# Altium PCB RD15002SCT_Collection.PcbDoc
Units mil, origin at the board's own origin, x right, y up, seen from the top; angles counter-clockwise.
Board outline 2710 x 2010 mil, 2 copper layers (Top Layer, Bottom Layer); 185 components, 184 nets, 612 pads, 138 vias.
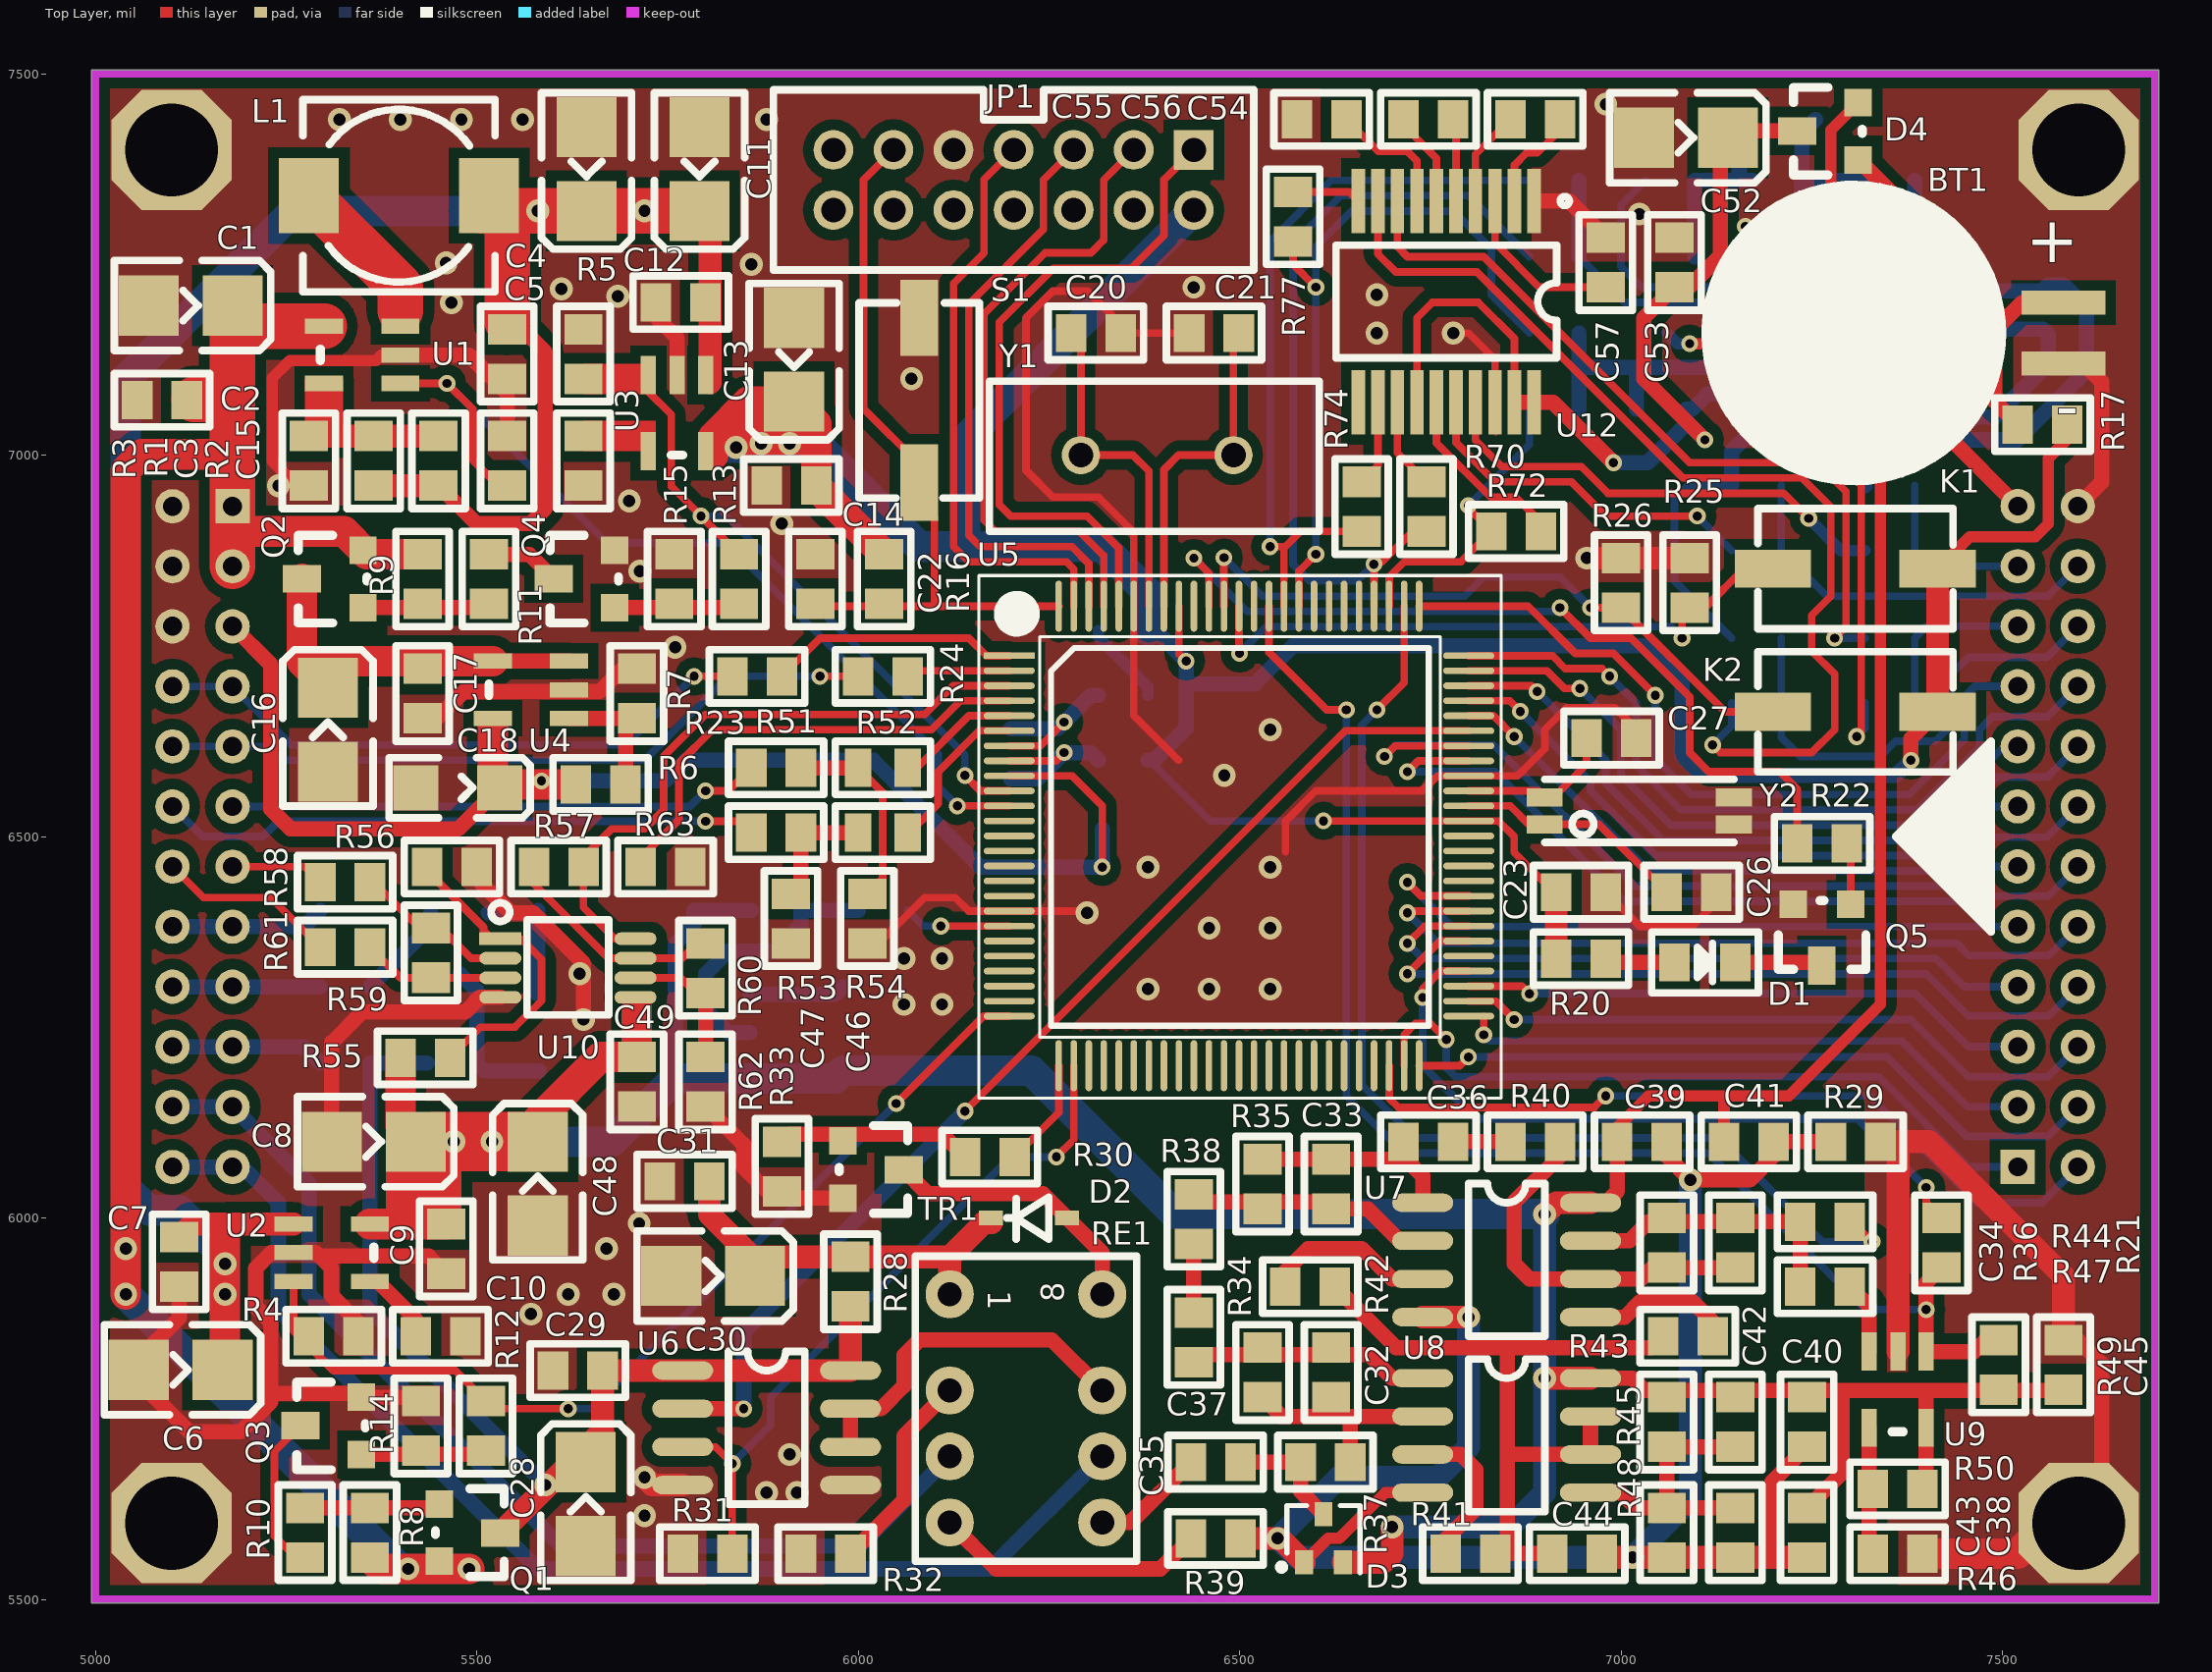
[diagram p0: Top Layer view]
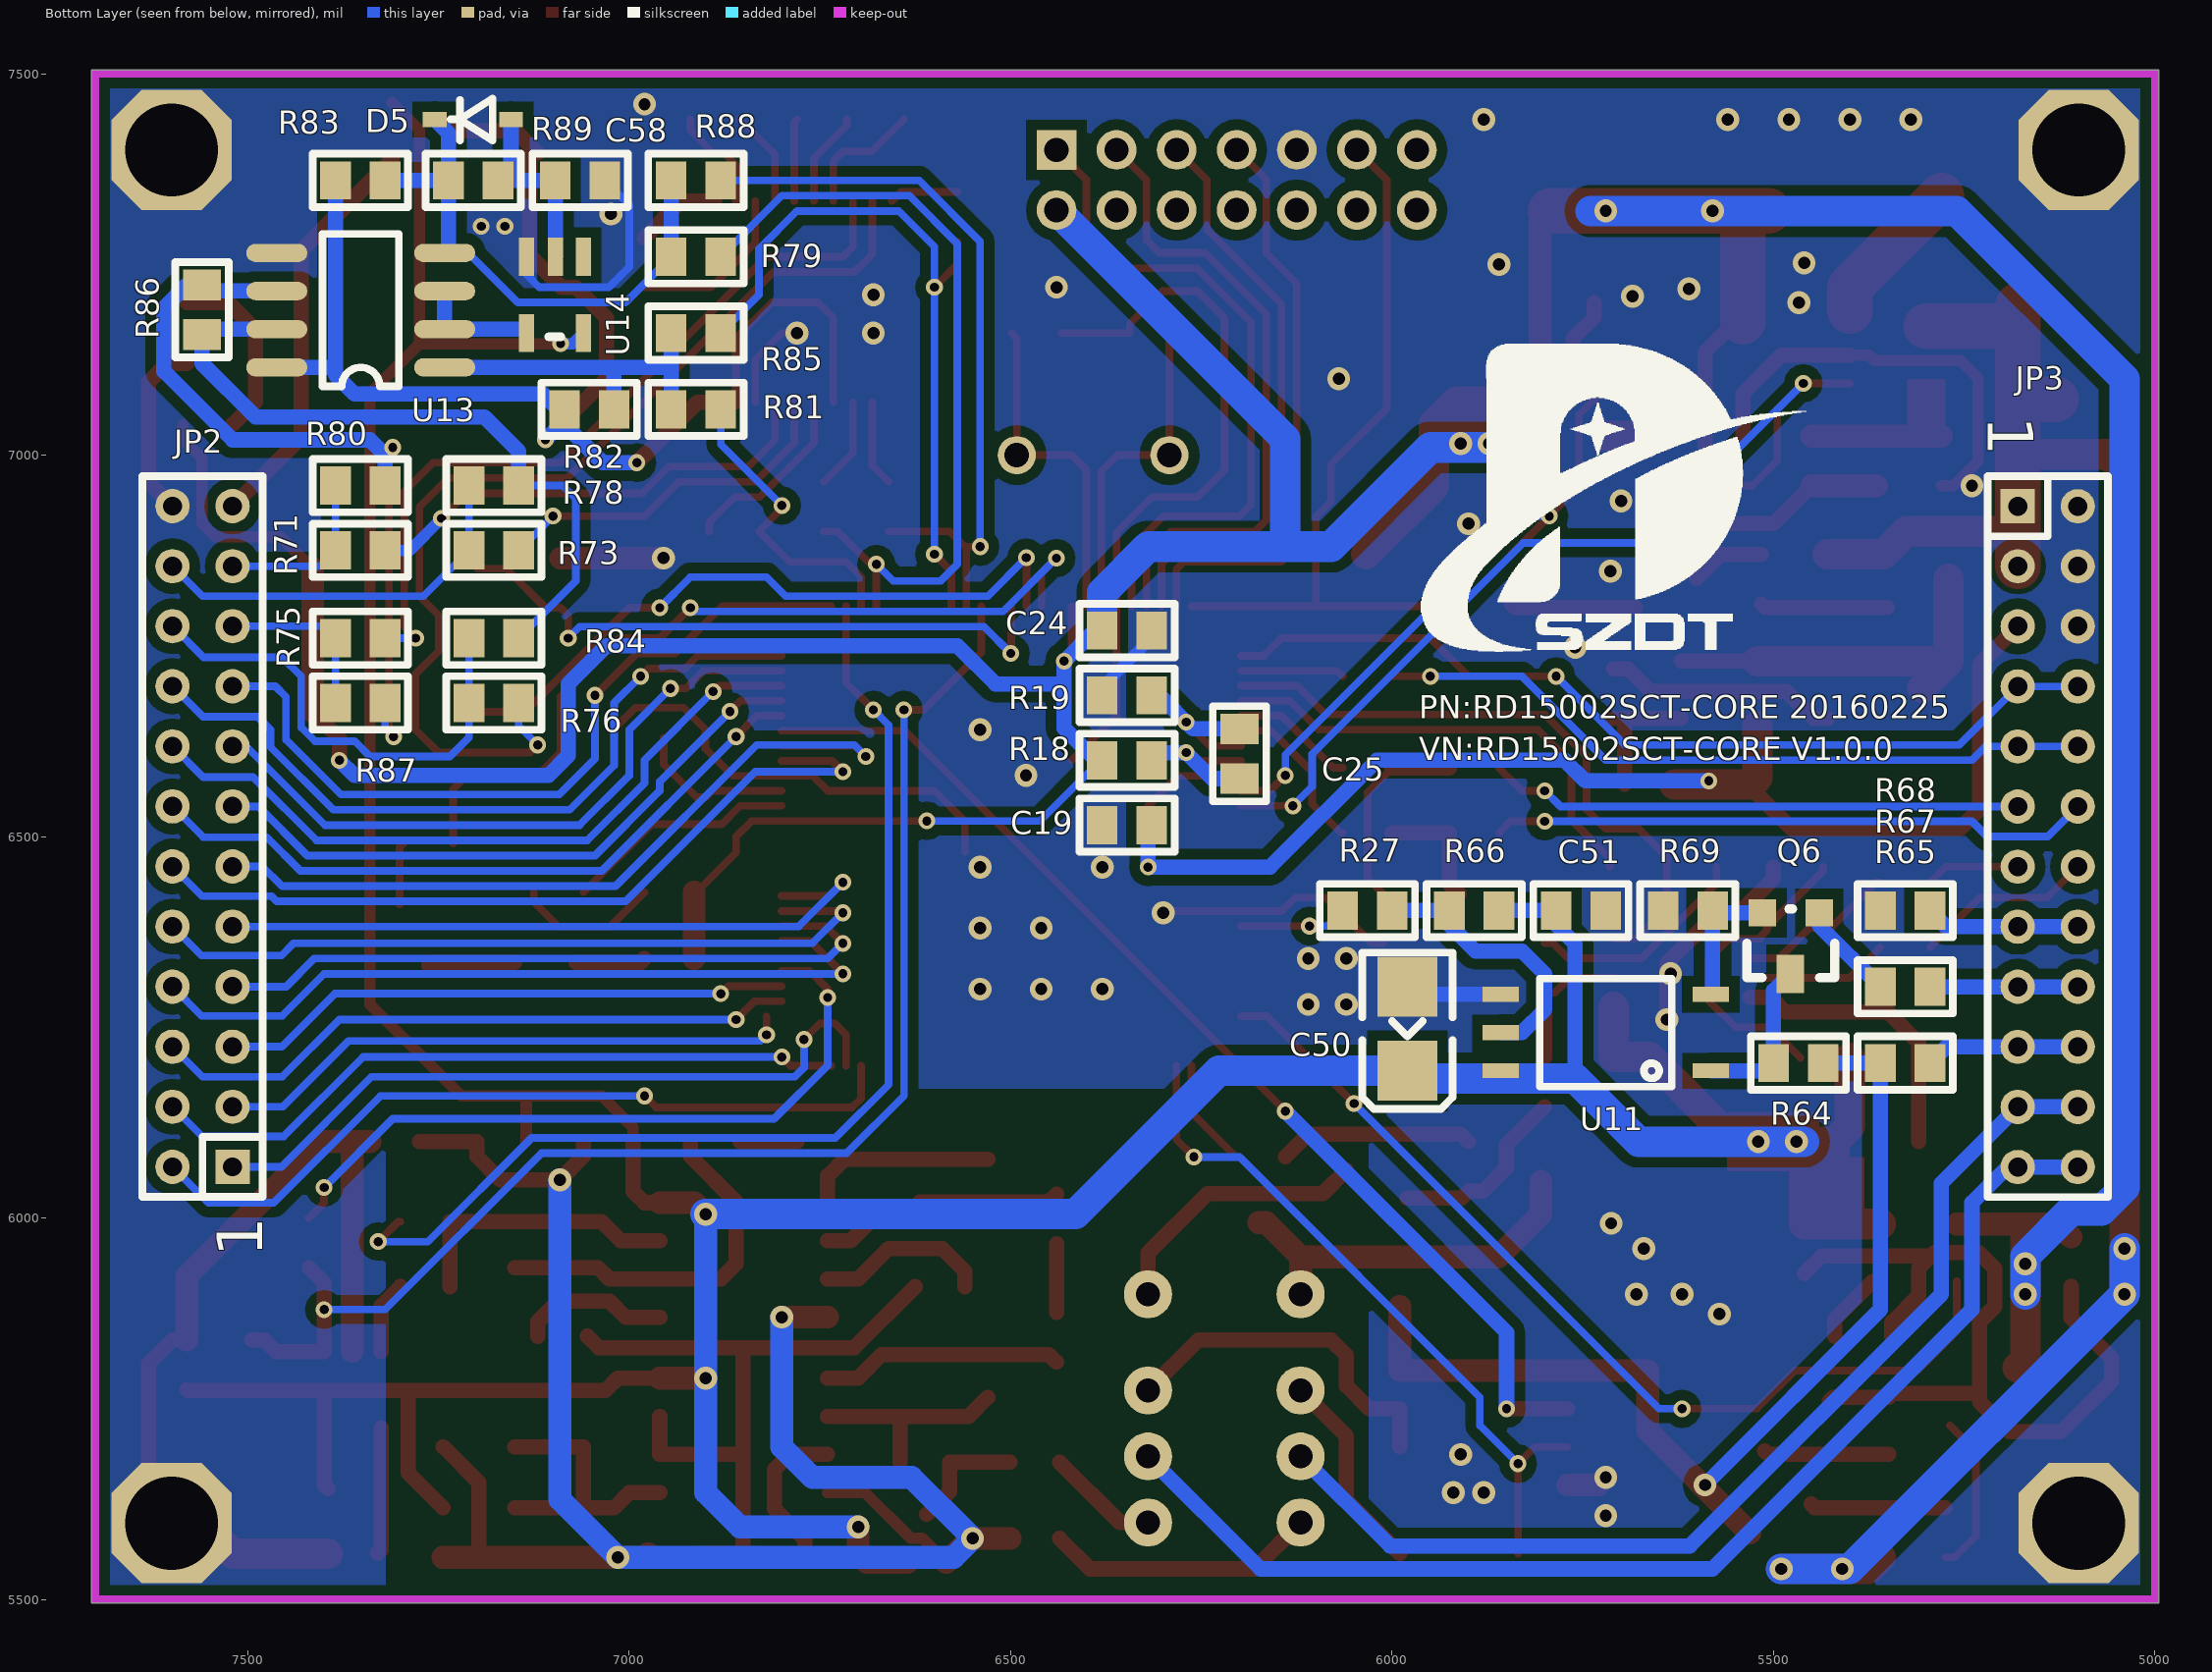
[diagram p1: Bottom Layer view, seen from below]

## Layer stack, top to bottom
Top Layer: signal copper 1.4
Dielectric: dielectric 12.6, FR-4, Dk 4.8
Bottom Layer: signal copper 1.4

## Board outline
4995,5495 7705,5495 7705,7505 4995,7505 4995,5495

## Design rules (kind name [scope] priority, off if disabled: settings)
Clearance [All] p1: gap=6
ComponentClearance [All] p1 off: gap=10 collisioncheckmode=3 verticalgap=10 showdistances=FALSE
HoleSize [All] p1: absolutevalues=TRUE maxlimit=1000 minlimit=1 maxpercent=80.000 minpercent=20.000
MinimumSolderMaskSliver [All] p1 off: minsoldermaskwidth=10
NetAntennae [All] p1 off: netantennaetolerance=0
PolygonConnect [All] p1: connectstyle=Direct reliefconductorwidth=10 reliefentries=4 polygonreliefangle="90 Angle" airgapwidth=10
RoutingPriority [All] p1: routingpriority=1
RoutingVias [All] p1: holewidth=20 width=50 viastyle="Through Hole" minholewidth=28 minwidth=50 maxholewidth=28 maxwidth=50
SilkToSilkClearance [All] p1 off: silktosilkclearance=10
SilkToSolderMaskClearance [IsPad] p1 off: minsilkscreentomaskgap=10 clearancetoexposedcopper=TRUE
SolderMaskExpansion [All] p1: expansion=4
Width [All] p1: maxlimit=1000 minlimit=6 preferedwidth=10
21 further rules are at their usual default settings.

## Components (designator, comment, footprint, x,y, rotation, side; value= is the part's Value field where it differs from the comment)
BT1 "MS920T" MS920T 7580,7200 r0 top
C1 "22uF/16V" CB3528 5180,7196 r180 top
C2 "0.1uF" CC0603#1 5055,7071.94 r0 top
C3 "100pF" CC0603#1 5450,7025 r270 top
C4 "22uF/16V" CB3528 5644,7320 r90 top
C5 "0.1uF" CC0603#1 5540,7100 r90 top
C6 "22uF/16V" CB3528 5167,5801 r180 top
C7 "0.1uF" CC0603#1 5110,5910 r90 top
C8 "22uF/16V" CB3528 5420,6100 r180 top
C9 "0.1uF" CC0603#1 5460,5927 r90 top
C10 "0.1uF" CC0603#1 5485,5845 r180 top
C11 "22uF/16V" CB3528 5792.11,7320 r90 top
C12 "0.1uF" CC0603#1 5735,7200 r0 top
C13 "22uF/16V" CB3528 5916,7070 r90 top
C14 "0.1uF" CC0603#1 5880,6960 r0 top
C15 "0.1uF" CC0603#1 5640,6960 r90 top
C16 "22uF/16V" CB3528 5305,6695 r270 top
C17 "0.1uF" CC0603#1 5429.06,6655 r90 top
C18 "10uF/16V" CA3216 5530,6564 r180 top
C19 "0.1uF" CC0603#1 6380,6515 r180 bottom
C20 "22pF" CC0603#1 6344,7160 r180 top
C21 "22pF" CC0603#1 6434,7160 r0 top
C22 "1uF" CC0603#1 5943.98,6870 r270 top
C23 "0.1uF" CC0603#1 6980,6427 r180 top
C24 "0.1uF" CC0603#1 6315,6770 r0 bottom
C25 "0.1uF" CC0603#1 6200,6641 r270 bottom
C26 "22pF" CC0603#1 7060,6427 r0 top
C27 "22pF" CC0603#1 6955,6629 r0 top
C28 "22uF/16V" CB3528 5643,5680 r270 top
C29 "0.1uF" CC0603#1 5600,5800 r0 top
C30 "22uF/16V" CB3528 5865,5924 r180 top
C31 "0.1uF" CC0603#1 5805,6048.06 r180 top
C32 "330pF" CC0603#1 6620,5830 r270 top
C33 "330pF" CC0603#1 6620,6077 r270 top
C34 "330pF" CC0603#1 7060,6000 r270 top
C35 "0.1uF" CC0603#1 6501,5680 r180 top
C36 "0.1uF" CC0603#1 6780,6100 r180 top
C37 "0.1uF" CC0603#1 6440,5876 r270 top
C38 "1uF" CC0603#1 7244,5555 r90 top
C39 "1uF" CC0603#1 7060,6100 r180 top
C40 "10nF" CC0603#1 7244,5765 r270 top
C41 "10nF" CC0603#1 7135,6100 r0 top
C42 "0.1uF" CC0603#1 7150,5765 r270 top
C43 "0.1uF" CC0603#1 7150,5620 r270 top
C44 "1uF" CC0603#1 6975,5560 r180 top
C45 "0.1uF" CC0603#1 7580,5840 r270 top
C46 "0.1uF" CC0603#1 6012,6425 r270 top
C47 "0.1uF" CC0603#1 5912,6425 r270 top
C48 "22uF/16V" CB3528 5580,6100 r270 top
C49 "0.1uF" CC0603#1 5710,6146 r90 top
C50 "22uF/16V" CB3528 5980,6193 r90 bottom
C51 "0.1uF" CC0603#1 5720,6403 r0 bottom
C52 "22uF/16V" CB3528 7140,7416 r180 top
C53 "0.1uF" CC0603#1 7070,7285 r270 top
C54 "0.1uF" CC0603#1 6855,7440.07 r0 top
C55 "0.1uF" CC0603#1 6575,7440 r0 top
C56 "0.1uF" CC0603#1 6715,7440.07 r0 top
C57 "0.1uF" CC0603#1 6980,7285 r270 top
C58 "100pF" CC0603#1 7032,7360 r0 bottom
D1 "LED" D0805 7070,6335 r0 top
D2 "CMDSH-3" SOD323 6274,6000 r180 top
D3 "DESD1P0RFW-7" SOT-323 6610,5580 r90 top
D4 "DIODE-CC" SOT-23W 7311,7387 r90 top
D5 "1N4148" SOD323 7155,7440 r0 bottom
JP1 "JTAG" IDC14-2.0MM 6440,7400 r180 top
JP2 "Header2*12" IDC24-2.0MM-INSERT 7520,6067 r90 bottom
JP3 "Header2*12" IDC24-2.0MM-INSERT 5180,6933 r270 bottom
K1 "F4" SPST 7199,6851 r0 top
K2 "F3" SPST 7199,6663.52 r0 top
L1 "10uH" SLF6025 5280,7340 r0 top
Q1 "CJ2301" SOT-23W 5451,5625 r270 top
Q2 "CJ2301" SOT-23W 5351,6800 r90 top
Q3 "MMBT3904" SOT-23W 5349.01,5690 r90 top
Q4 "MMBT3904" SOT-23W 5680.99,6800.02 r90 top
Q5 "MMBT3904" SOT-23W 7301,6411 r180 top
Q6 "MMBT3904" SOT-23W 5440,6400 r0 bottom
R1 "105K" CC0603#1 5365,6960 r90 top
R2 "100K" CC0603#1 5540,6960 r90 top
R3 "20K" CC0603#1 5280,7025 r270 top
R4 "100K" CC0603#1 5280,5845 r0 top
R5 "100K" CC0603#1 5640,7100 r90 top
R6 "20K" CC0603#1 5630,6568.37 r0 top
R7 "20K" CC0603#1 5710,6655 r90 top
R8 "47K 1%" CC0603#1 5359.99,5555.02 r90 top
R9 "47K 1%" CC0603#1 5428.99,6870 r270 top
R10 "47K" CC0603#1 5274.99,5620.02 r270 top
R11 "47K" CC0603#1 5515.99,6805 r90 top
R12 "4.7K" CC0603#1 5512,5759.98 r270 top
R13 "4.7K" CC0603#1 5843.98,6870 r270 top
R14 "10K" CC0603#1 5427,5694.98 r90 top
R15 "10K" CC0603#1 5758.98,6805 r90 top
R16 "10K" CC0603#1 6034,6805 r90 top
R17 "22R" CC0603#1 7585,7040 r180 top
R18 "0" CC0603#1 6315,6600 r0 bottom
R19 "0" CC0603#1 6315,6685 r0 bottom
R20 "200R" CC0603#1 6980,6340 r180 top
R21 "0" CC0603#1 7420,5935 r90 top
R22 "1K" CC0603#1 7296,6491 r180 top
R23 "0" CC0603#1 5900,6710 r180 top
R24 "0" CC0603#1 6065,6710 r180 top
R25 "12K" CC0603#1 7090,6865 r270 top
R26 "12K" CC0603#1 7000,6865 r270 top
R27 "0" CC0603#1 6065,6403 r180 bottom
R28 "10" CC0603#1 5990,5884 r90 top
R29 "0R" CC0603#1 7275,6100 r0 top
R30 "10K" CC0603#1 6205,6080 r180 top
R31 "100K" CC0603#1 5835,5560 r180 top
R32 "100" CC0603#1 5990,5560 r180 top
R33 "100K" CC0603#1 5900,6035 r90 top
R34 "100K" CC0603#1 6530,5830 r270 top
R35 "100K" CC0603#1 6530,6077 r270 top
R36 "100K" CC0603#1 7150,6000 r270 top
R37 "4.7K" CC0603#1 6645,5680 r180 top
R38 "4.7K" CC0603#1 6440,6031 r270 top
R39 "100" CC0603#1 6436,5580 r0 top
R40 "4.7K" CC0603#1 6920,6100 r180 top
R41 "0R" CC0603#1 6770,5560 r0 top
R42 "0R" CC0603#1 6560,5910 r0 top
R43 "0R" CC0603#1 7120,5845 r180 top
R44 "1K" CC0603#1 7235,5995 r0 top
R45 "100K 1%" CC0603#1 7060,5765 r270 top
R46 "100K" CC0603#1 7330,5560 r0 top
R47 "1K" CC0603#1 7300,5910 r180 top
R48 "100K 1%" CC0603#1 7060,5620 r270 top
R49 "10K" CC0603#1 7495,5775 r90 top
R50 "100K" CC0603#1 7395,5645 r180 top
R51 "1K" CC0603#1 5925,6590 r180 top
R52 "1K" CC0603#2 6065,6590 r180 top
R53 "1K" CC0603#1 5925,6505 r180 top
R54 "1K" CC0603#2 6065,6505 r180 top
R55 "0" CC0603#1 5465,6210 r180 top
R56 "0" CC0603#1 5500,6460 r180 top
R57 "49.9K 1%" CC0603#1 5575,6460 r0 top
R58 "100K" CC0603#1 5360,6440 r180 top
R59 "49.9K" CC0603#1 5440,6380 r270 top
R60 "49.9K 1%" CC0603#1 5800,6360 r270 top
R61 "100K" CC0603#1 5360,6355 r180 top
R62 "0R" CC0603#1 5800,6211 r270 top
R63 "0R" CC0603#1 5715,6460 r0 top
R64 "0" CC0603#1 5435,6203 r0 bottom
R65 "3.3K" CC0603#1 5360,6203 r180 bottom
R66 "0" CC0603#1 5860,6403 r0 bottom
R67 "1K" CC0603#1 5295,6303 r0 bottom
R68 "0" CC0603#1 5295,6403 r0 bottom
R69 "470" CC0603#1 5580,6403 r0 bottom
R70 "0R" CC0603#1 6745,6900 r90 top
R71 "0R" CC0603#1 7320,6875 r0 bottom
R72 "0R" CC0603#1 6830,6900 r0 top
R73 "0R" CC0603#1 7145,6875 r0 bottom
R74 "0R" CC0603#1 6660,6900 r90 top
R75 "0R" CC0603#1 7320,6760 r0 bottom
R76 "0R" CC0603#1 7145,6675 r0 bottom
R77 "0R" CC0603#1 6570,7280 r90 top
R78 "0R" CC0603#1 7145,6960 r0 bottom
R79 "0R" CC0603#1 6880,7260 r0 bottom
R80 "0R" CC0603#1 7320,6960 r0 bottom
R81 "0R" CC0603#1 6880,7060 r0 bottom
R82 "10K" CC0603#1 7020,7060 r0 bottom
R83 "10K" CC0603#1 7320,7360 r0 bottom
R84 "0R" CC0603#1 7145,6760 r0 bottom
R85 "0R" CC0603#1 6880,7160 r0 bottom
R86 "120R" CC0603#1 7560,7223 r270 bottom
R87 "0R" CC0603#1 7320,6675 r0 bottom
R88 "0R" CC0603#1 6880,7360 r0 bottom
R89 "10K" CC0603#1 7172,7360 r0 bottom
RE1 "G6K" G6K 6120,5900 r270 top
S1 "RESET" SPST 6080,7180 r270 top
TR1 "MMBT3904" SOT-23W 5980,6101 r270 top
U1 "TPS560200" SOT-23-5 5400,7094 r270 top
U2 "LP2985-3.3" SOT-23-5 5260,5992 r90 top
U3 "LP2985-3.3" SOT-23-5 5800,7105 r0 top
U4 "LM4121-ADJ/1.2" SOT-23-5 5621,6655 r270 top
U5 "MSP430F47126" TQFP100 6198,6737 r0 top locked
U6 "FAN3122T" SO-8 5770,5800 r0 top
U7 "LT1807" SO-8 6740,6020 r0 top
U8 "LT1807" SO-8 6740,5790 r0 top
U9 "TLV3491AID" SOT-23-5 7400,5825 r0 top
U10 "AD8237" MSOP8 5531,6366 r0 top
U11 "PC410" PC410 5720,6243 r90 bottom
U12 "MAX3223EEAP" TSSOP20 6886,7333.07 r270 top
U13 "SN65HVD72/75/78" SO-8 7242,7115 r0 bottom
U14 "74HC1G14" SOT-23-5 7060,7260 r180 bottom
Y1 "1M" XCYAI 6392,7000 r0 top
Y2 "32.768KHz" MC-146 6900,6516 r0 top
? "" LOGO 5735,6945 r180 bottom

## Footprints (in the part's own frame and the unit in brackets; to place one, negate y for a bottom-side part, rotate by r counter-clockwise, add the part's x,y. Pads: shape width x height; smd on the part's side, far side on the other; paste and mask are expansions set on the pad)
CA3216 [mm]
  rect 1.5x1.5 smd: 1(0,0) 2(2.794,0)
  silkscreen extent -1.02,-1 3.68,1
CB3528 [mm]
  rect 2x2 smd: 1(0,0) 2(2.794,0)
  silkscreen extent -1.27,-1.5 3.94,1.5
CC0603#1 [mil]
  rect 40x50 smd: 1(0,0) 2(65,0)
  silkscreen extent -30,-35 95,35
CC0603#2 [mil]
  rect 35x50 smd: 1(0,0) 2(65,0)
  silkscreen extent -30,-35 95,35
D0805 [mil]
  rect 40x50 smd: 1(0,0) 2(80,0)
  silkscreen extent -30,-40 110,40
G6K [mm]
  round 1.6 hole 0.8: 1(0,0) 2(3.2,0) 3(5.4,0) 4(7.6,0) 5(7.6,5.08) 6(5.4,5.08) 7(3.2,5.08) 8(0,5.08)
  silkscreen extent -1.27,-1.14 8.89,6.22
IDC14-2.0MM [mil]
  rect 52x52 hole 32: 1(0,0)
  round 52 hole 32: 2(0,78.74) 3(78.74,0) 4(78.74,78.74) 5(157.48,0) 6(157.48,78.74) 7(236.22,0) 8(236.22,78.74) 9(314.96,0) 10(314.96,78.74) 11(393.7,0) 12(393.7,78.74) 13(472.44,0) 14(472.44,78.74)
  silkscreen extent -79,-79 551,157
IDC24-2.0MM-INSERT [mil]
  rect 45x45 hole 25: 1(0,0)
  round 45 hole 25: 2(0,78.74) 3(78.74,0) 4(78.74,78.74) 5(157.48,0) 6(157.48,78.74) 7(236.22,0) 8(236.22,78.74) 9(314.96,0) 10(314.96,78.74) 11(393.7,0) 12(393.7,78.74) 13(472.44,0) 14(472.44,78.74) 15(551.18,0) 16(551.18,78.74) 17(629.92,0) 18(629.92,78.74) 19(708.66,0) 20(708.66,78.74) 21(787.4,0) 22(787.4,78.74) 23(866.14,0) 24(866.14,78.74)
  silkscreen extent -39,-39 906,118
LOGO [mil]
  silkscreen extent -227,-203 278,200
MC-146 [mm]
  rect 1.2x0.6 smd: 1(0,0) 2(6.3,0) 3(6.3,0.9) 4(0,0.9)
  silkscreen extent 0,-0.6 6.3,1.5
MS920T [mm]
  rect 2.8x0.8 smd: 1(0,0) 2(0,-2.032)
  silkscreen extent -11.98,-6.02 -1.99,3.98
MSOP8 [mm]
  rect 1.4x0.42 smd: 1(0,0)
  oval 1.4x0.42 smd: 2(0,-0.65) 3(0,-1.3) 4(0,-1.95) 5(4.5,-1.95) 6(4.5,-1.3) 7(4.5,-0.65) 8(4.5,0)
  silkscreen extent -0.31,-2.54 3.61,1.2
PC410 [mm]
  rect 0.5x1.2 smd: 1(-1.27,-3.5) 3(1.27,-3.5) 4(1.27,3.5) 5(0,3.5) 6(-1.27,3.5)
  silkscreen extent -1.8,-2.2 1.8,2.2
SLF6025 [mm]
  rect 2x2.5 smd: 1(0,0) 2(6,0)
  silkscreen extent -0.2,-3.2 6.2,3.2
SO-8 [mil]
  oval 80x24 smd: 1(0,0) 2(0,-50) 3(0,-100) 4(0,-150) 5(220,-150) 6(220,-100) 7(220,-50) 8(220,0)
  silkscreen extent 60,-175 160,25
SOD323 [mm]
  rect 0.8x0.5 smd: 1(0,0) 2(2.54,0)
  silkscreen extent 0.61,-0.7 2.01,0.7
SOT-23-5 [mil]
  rect 20x50 smd: 1(0,0) 2(-37,0) 3(-75,0) 4(-75,-100) 5(0,-100)
  silkscreen extent -45,-105 -30,-105
SOT-23W [mil]
  rect 35.98x35.98 smd: 1(0,0) 2(75,0)
  rect 35.98x50 smd: 3(37.99,80)
  silkscreen extent -20,-5 95,85
SOT-323 [mm]
  rect 0.8x0.6 smd: 1(-0.8,0.65) 2(-0.8,-0.65) 3(0.8,0)
  silkscreen extent -1.14,-1.22 1.09,1.49
SPST [mil]
  rect 100x50 smd: 1(0,0) 2(216,0)
  silkscreen extent -20,-79 236,79
TQFP100 [mm]
  rect 1.7x0.22 smd: 1(0,0)
  oval 1.7x0.22 smd: 2(0,-0.5) 3(0,-1) 4(0,-1.5) 5(0,-2) 6(0,-2.5) 7(0,-3) 8(0,-3.5) 9(0,-4) 10(0,-4.5) 11(0,-5) 12(0,-5.5) 13(0,-6) 14(0,-6.5) 15(0,-7) 16(0,-7.5) 17(0,-8) 18(0,-8.5) 19(0,-9) 20(0,-9.5) 21(0,-10) 22(0,-10.5) 23(0,-11) 24(0,-11.5) 25(0,-12) 51(15.3,-12) 52(15.3,-11.5) 53(15.3,-11) 54(15.3,-10.5) 55(15.3,-10) 56(15.3,-9.5) 57(15.3,-9) 58(15.3,-8.5) 59(15.3,-8) 60(15.3,-7.5) 61(15.3,-7) 62(15.3,-6.5) 63(15.3,-6) 64(15.3,-5.5) 65(15.3,-5) 66(15.3,-4.5) 67(15.3,-4) 68(15.3,-3.5) 69(15.3,-3) 70(15.3,-2.5) 71(15.3,-2) 72(15.3,-1.5) 73(15.3,-1) 74(15.3,-0.5) 75(15.3,0)
  oval 0.22x1.7 smd: 26(1.65,-13.65) 27(2.15,-13.65) 28(2.65,-13.65) 29(3.15,-13.65) 30(3.65,-13.65) 31(4.15,-13.65) 32(4.65,-13.65) 33(5.15,-13.65) 34(5.65,-13.65) 35(6.15,-13.65) 36(6.65,-13.65) 37(7.15,-13.65) 38(7.65,-13.65) 39(8.15,-13.65) 40(8.65,-13.65) 41(9.15,-13.65) 42(9.65,-13.65) 43(10.15,-13.65) 44(10.65,-13.65) 45(11.15,-13.65) 46(11.65,-13.65) 47(12.15,-13.65) 48(12.65,-13.65) 49(13.15,-13.65) 50(13.65,-13.65) 76(13.65,1.65) 77(13.15,1.65) 78(12.65,1.65) 79(12.15,1.65) 80(11.65,1.65) 81(11.15,1.65) 82(10.65,1.65) 83(10.15,1.65) 84(9.65,1.65) 85(9.15,1.65) 86(8.65,1.65) 87(8.15,1.65) 88(7.65,1.65) 89(7.15,1.65) 90(6.65,1.65) 91(6.15,1.65) 92(5.65,1.65) 93(5.15,1.65) 94(4.65,1.65) 95(4.15,1.65) 96(3.65,1.65) 97(3.15,1.65) 98(2.65,1.65) 99(2.15,1.65) 100(1.65,1.65)
  silkscreen extent -1.02,-14.73 16.38,2.67
TSSOP20 [mm]
  rect 2.15x0.45 smd: 1(0,0) 2(0,-0.65) 3(0,-1.3) 4(0,-1.95) 5(0,-2.6) 6(0,-3.25) 7(0,-3.9) 8(0,-4.55) 9(0,-5.2) 10(0,-5.85) 11(6.7,-5.85) 12(6.7,-5.2) 13(6.7,-4.55) 14(6.7,-3.9) 15(6.7,-3.25) 16(6.7,-2.6) 17(6.7,-1.95) 18(6.7,-1.3) 19(6.7,-0.65) 20(6.7,0)
  silkscreen extent -0.15,-6.6 5.23,1.18
XCYAI [mil]
  round 50 hole 32: 1(-100,0) 2(100,0)
  silkscreen extent -220,-100 212,97

## Free pads (board coordinates)
  oct 157.48x157.48 hole 122.05: 1(7600,7400) 2(7600,5600) 3(5100,5600) 4(5100,7400)

## Via types
v1: diameter 30, hole 16, Top Layer to Bottom Layer, 70 vias
v2: diameter 22, hole 12, Top Layer to Bottom Layer, 68 vias

## Nets (pads, with @x,y where several pads share a name; then routed paths per layer and width w, separated by ;. In a path a pad name is that pad's centre, name@x,y a point inside that pad or via, vN(x,y) a via of type N, cw(c..) or ccw(c..) an arc to the next point about the centre after c; other vN are vias at no path point)
+3.3VCOLL: C8.1 C9.2 C38.2 C39.2 C40.1 C41.1 C42.1 C45.2 C48.1 C49.2 C50.1 C51.2 D3.2 D4.2 R45.1 R49.1 R50.1 R55.2 R66.1 U2.5 U7.8 U8.8 U9.5 U10.5 U11.6 U14.5 | length 6393.7
  Top Layer w15: C39.2 6995,6119 7036,6160 7220,6160 7340,6280 7340,7081 7275,7146 ; v2(7090,7146) 7275,7146 ; C41.1 7135,6160 ; D4.2 7275,7426 7275,7146
  Top Layer w20: U8.8 7015,5790 7031,5774 7579,5774 C45.2 ; U7.8 6980,6020 6995,6035 C39.2 ; C38.2 7290,5666 7290,5774 ; R50.1 7400,5650 7400,5774
  Top Layer w30: D3.2 6688.5,5548.5 6700,5560 v1(6700,5595) ; v1(6900,5790) U8.8 ; v1(6900,6005) 6915,6020 U7.8
  Top Layer w40: U2.5 C9.2 ; R55.2 5400,6120 C8.1 ; 5420,5992 C8.1 ; 5710,6277 C49.2 5662,6211 5580,6129 C48.1 C8.1
  Bottom Layer w15: U14.5 7074,7146 v2(7090,7146)
  Bottom Layer w20: 5760,6183 5760,6359 5785,6384 C51.2 R66.1
  Bottom Layer w30: v1(6700,5595) 6855,5595 6900,5640 v1(6900,6005)
  Bottom Layer w40: v1@5460,6100 5677,6100 5760,6183 5970,6183 C50.1 6227,6193 6415,6005 v1(6900,6005)
  other v1: 5470,6100 5520,6100
+3.3VCOM: C52.1 C53.2 D4.3 R82.2 R83.2 U12.14 U12.19 U12.20 U13.8 | length 1922.1
  Top Layer w10: U12.14 6732.46,7180 6752.46,7200 6813,7200 6860.41,7152.59 U12.19
  Top Layer w20: U12.19@6862,7069.29 6910.71,7069.29 v2(6990,6990) ; v2(7110,7020) 7030,7100 7030,7180 C53.2 7089,7220 7130,7261 C52.1@7130,7406 ; C52.1@7120,7396 7148.99,7424.99 D4.3
  Bottom Layer w20: v2(6990,6990) 7035,6990 R82.2@7085,7040 ; v2(7110,7020) 7085,7045 R82.2 7093,7060 7113,7080 7360,7080 7385,7105 R83.2 ; 7385,7115 U13.8
+3.3VCORE: C13.1 C14.2 C23.2 C24.2 JP1.2 K1.2 K2.2 R16.2 R17.1 R18.2 R20.2 U3.5 U5.64 U5.92 | length 4335.8
  Top Layer w10: U5.92 6420.44,6739.56 v2(6430,6730) ; v2(6610,6520.47) 6839.53,6520.47 6860,6500 6860,6479 6912,6427 C23.2
  Top Layer w15: K1.2 7457,6893 7543,6893 7560,6910 7560,6996 7585,7021 R17.1
  Top Layer w20: v2(7380,6600) 7380,6628.52 K2.2
  Top Layer w30: R20.2 C23.2 ; K2.2 K1.2
  Top Layer w40: 5810,7000 5810,7024 5856,7070 C13.1 5945,7041 5945,6959 R16.2
  Bottom Layer w10: R18.2 6382,6600 6461.53,6520.47 v2(6610,6520.47)
  Bottom Layer w20: R18.2 6388,6600 6430,6642 v2(6430,6730) 6390,6770 C24.2 ; 6430,6700 6520,6700 6570,6750 7030,6750 7080,6700 7080,6606 7106,6580 7360,6580 v2(7380,6600)
  Bottom Layer w40: 5820,7010 5950,7010 6080,6880 6320,6880 6380,6820 C24.2 ; 6140,6880 6140,7021.26 JP1.2
  other v1: 5840,7010 5873,7015 5910,7015
+3.3VTRAN: D4.1 JP2.23 | length 540.4
  Top Layer w20: D4.1 7430,7268 7430,7023.14 JP2.23
+3.6V: C3.2 C4.1 C5.2 C6.1 C7.2 C11.1 C12.2 L1.2 R1.1 U2.1 U3.1 | length 3594.9
  Top Layer w20: C3.2 5500,6910 5570,6910 5590,6930 5590,7135 5560,7165 C5.2
  Top Layer w30: C7.2 5127,5992 U2.1 ; R1.1 C3.2 ; C11.1 5806,7306.11 U3.1@5806,7095
  Top Layer w40: 5170,5987 5170,5814 C6.1@5180,5804
  Top Layer w60: L1.2@5507,7320 C11.1 ; C5.2@5540,7175 L1.2@5540,7320
  Bottom Layer w40: v1(5170,5900) 5170,5950 5110,6010 5070,6010 5040,6040 5040,7100 5260,7320 5740,7320
  other v1: 5170,5940 5580,7320 5720,7320
AGND: C38.1 C39.1 C40.2 C41.2 C43.2 C44.1 D3.1 R29.1 R39.2 R48.2 U7.4 U8.4 | length 2535.7
  Top Layer w15: D3.1 6615.91,5580 6631,5580 6691,5640 U8.4
  Top Layer w20: C39.1 7060,6081 v1(7091,6050) 7169,6050 7200,6081 C41.2 R29.1 ; 7197,5555 7197,5653 C40.2
  Top Layer w30: R39.2 6552.91,5580 D3.1 ; U7.4 v1(6800,5870) ; C44.1 6980,5555 C38.1
  Bottom Layer w30: v1(6800,5870) 6800,5700 6760,5660 6630,5660 v1(6550,5580) 6575,5555 v1(7015,5555) 7091,5631 v1(7091,6050)
AVCC: C25.2 R18.1 U5.8 | length 209.7
  Top Layer w10: U5.8 6259.2,6599.2 v2(6270,6610)
  Bottom Layer w20: C25.2 6236,6576 v2(6270,6610) 6305,6610 R18.1
AVSS: C25.1 R19.1 U5.7 | length 218.1
  Top Layer w10: U5.7 6238.89,6618.89 v2(6270,6650)
  Bottom Layer w20: C25.1 6261,6641 6305,6685 R19.1
BLACK: JP3.21 JP3.22 RE1.3 | length 1391.1
  Bottom Layer w20: JP3.22 JP3.21 5280,6045.6 5280,5900 5610,5570 6002.6,5570 RE1.3
BLACK_R: R39.1 RE1.4 | length 357.7
  Top Layer w20: RE1.4 6180.79,5540 6396,5540 R39.1
BLACK_T: R32.1 RE1.2 | length 267.9
  Top Layer w20: R32.1 6060,5630 6060,5714.02 RE1.2
COLL_PWR_CN: R4.1 R12.1 U2.3 U5.25 | length 1258.4
  Top Layer w10: U2.3 5260,5852 5312,5800 5471.98,5800 5521.98,5750 v2(5620,5750) ; v2(6050,6150) 6164.56,6264.56 U5.25
  Bottom Layer w10: v2(5620,5750) 5650,5750 v2(6050,6150)
CORE_PWR_CN: R5.1 R13.1 U3.3 U5.10 | length 853.3
  Top Layer w10: U3.3 5725,7083 5755,7053 5755,6958.98 R13.1 ; v2(6140,6580) 6160.16,6559.84 U5.10
  Bottom Layer w10: v2(5794,6920) 5827,6920 6140,6607 v2(6140,6580)
DGND: BT1.2 C1.2 C2.1 C4.2 C5.1 C6.2 C7.1 C8.2 C9.1 C10.1 C11.2 C12.1 C13.2 C14.1 C15.1 C16.2 C17.1 C18.2 C19.1 C20.1 C21.1 C22.1 C23.1 C24.1 C26.2 C27.2 C28.2 C29.1 C30.2 C31.2 C45.1 C46.2 C47.2 C48.2 C49.1 C50.2 C51.1 C52.2 C53.1 C55.1 C57.1 C58.1 JP1.9 JP2.24 JP3.2 JP3.4 JP3.6 pad.1 pad.2 pad.3 pad.4 Q3.2 Q4.2 Q5.2 R2.2 R3.2 R4.2 R5.2 R7.2 R14.2 R15.2 R19.2 R25.1 R26.1 R29.2 R31.2 R32.2 R33.1 R46.2 R56.1 R62.2 R63.2 R68.2 R69.2 S1.1 TR1.2 U1.2 U2.2 U3.2 U4.2 U5.18 U5.67 U5.95 U6.4 U6.5 U9.2 U10.4 U11.4 U12.1 U12.18 U13.5 U14.3 Y2.2 Y2.3 | length 7445.9
  Top Layer w10: C46.2 6027,6360 6087,6420 6127,6420 6144.65,6402.35 v1@6299.65,6402.35 ; 6420,6600 6361.39,6658.61 6361.39,6898.61 6315,6945 6255,6945 6220,6980 6220,7180 6255,7215 6301,7215 6344,7172 C20.1 C21.1 ; 6560,6480 6560,6520 6600,6560 6740,6560 6759.52,6579.52 6864.52,6579.52 6900,6615 6900,6640 6929,6669 6992,6669 7020,6641 C27.2 ; v1(6780,7160) 6800,7160 6834.82,7125.18 U12.18 ; C23.1 7025,6382 7093,6382 7125,6414 C26.2
  Top Layer w15: R3.2 5264,6960 5232,6992 5232,7101 5255,7124 5368,7124 5375,7131 U1.2
  Top Layer w20: C7.1 5110,5869 5057,5816 C6.2 5057,5786 5123,5720 5191,5720 5230,5759 5230,5864 5210,5884 5210,5934 5231,5955 5289,5955 5310,5934 5310,5898 5345,5863 R4.2 ; 5230,5770 5344.01,5770 Q3.2 5421.98,5765 R14.2 ; 5294,5950 5437,5950 C9.1 ; C8.2 5310,6230 5350,6270 5485,6270 5504.23,6289.23 U10.4 ; U1.2 5490,7131 5540,7081 R2.2 ; C17.1 5448,6655 5483,6690 5661,6690 5691,6720 R7.2 ; R56.1 5500,6445 5545,6400 5574,6400 5640,6334 v1(5640,6260) ; C12.1 5735,7181 5763,7153 U3.2 ; R62.2 5850,6096 5850,6066 5881,6035 R33.1 5909,6026 TR1.2 ; U12.1@6888,7333 6932,7333 C57.1 ; pad.2@7560,5600 7630,5670 7630,5809 7599,5840 C45.1 ; BT1.2 7606,7120 7630,7096 7630,6964.4 JP2.24
  Top Layer w30: v1(5720,5660) 5730,5650 U6.4 ; v1(6955,6865) R25.1 ; R29.2 7404,6100 7580,5924 C45.1 ; U9.2 7363,6100
  Top Layer w40: R46.2 7520,5560 pad.2@7560,5600
  Bottom Layer w10: C58.1 7000,7328 7000,7247 7027,7220 7118,7220 7135,7237 U14.3
  Bottom Layer w15: C24.1 6315,6761 6380,6696 R19.2
  Bottom Layer w20: U11.4 5970,6293 C50.2
  other v1: 5720,5610 5880,5640 5920,5640 5910,5690 5571,5874 5620,5900 5680,5900 5670,5960 5713,5993 6060,6280 6110,6280 6380,6300 6460,6300 6540,6300 5635,6320 6060,6340 6110,6340 6460,6380 6540,6380 6300,6400 6380,6460 6540,6460 6480,6580 6540,6640 5760,6748 5714,6848 5900,6910 5700,6940 5240,6960 6070,7100 6680,7160 5467,7200 5685,7208 6680,7210 5611,7218 6440,7220 5860,7250 5460,7252 7024,7316 5320,7440 5400,7440 5480,7440 5560,7440 5880,7440 6980,7460
  other v2: 7163,7300 7194,7300
DTU_DCD: JP2.2 U5.48 | length 1034
  Top Layer w10: U5.48 6696.03,6156.97 6708,6145 6965,6145 v2(6980,6160)
  Bottom Layer w10: v2(6980,6160) 7326,6160 7466,6020 7551.74,6020 JP2.2
DTU_ONOFF: JP2.1 U5.49 | length 950.4
  Top Layer w10: U5.49 6715.72,6240 6730.72,6255 6750,6255 v2(6771,6234)
  Bottom Layer w10: v2(6771,6234) 6771,6197 6783,6185 7338,6185 7456,6067 JP2.1
GREEN: JP3.9 JP3.10 R24.2 | length 951.8
  Top Layer w10: v2(5950,6710) R24.2
  Bottom Layer w10: JP3.10 5221.96,6618.04 5240,6600 5720,6600 5830,6710 v2(5950,6710)
IN0+: R23.1 U5.1 | length 328.2
  Top Layer w10: R23.1 5950,6760 6145,6760 6168,6737 U5.1
IN0-: R24.1 U5.2 | length 136
  Top Layer w10: R24.1 6072.31,6717.31 U5.2
IN1+: R57.2 U5.3 U10.8 | length 843.2
  Top Layer w10: U10.8 5681,6366 5640,6407 5640,6473 5677,6510 5720,6510 5745,6535 5745,6605 5800,6660 6087,6660 6124.63,6697.63 U5.3
IN1-: R63.1 U5.4 | length 623.7
  Top Layer w10: R63.1 5715,6472 5765,6522 5765,6596 5809,6640 6096,6640 6133.94,6677.94 U5.4
IN2+: R52.1 U5.5 | length 161.3
  Top Layer w10: R52.1 6077,6590 6145.26,6658.26 U5.5
IN2-: R54.1 U5.6 | length 212.9
  Top Layer w10: R54.1 6067,6505 6105,6543 6105,6585 6158.57,6638.57 U5.6
IN4+: U5.12
IN4-: U5.13
IN5+: U5.14
IN5-: U5.15
LCDCAP: U5.63
MCURXD0: R72.1 R81.1 U5.78 | length 402.4
  Top Layer w10: U5.78 6696.03,6840.03 6716,6860 6790,6860 R72.1 6800,6930 v2(6800,6934)
  Bottom Layer w10: v2(6800,6934) 6880,7014 R81.1
MCURXD1: R77.1 R85.1 U5.84 | length 953.5
  Top Layer w10: R77.1 6570,7250 v2(6600,7220) ; U5.84 6577.92,6847.92 v2(6600,6870)
  Bottom Layer w10: v2(6600,6870) 6600,7273 6647,7320 6780,7320 6830,7270 6830,7210 R85.1
MCUTXD0: R70.1 R79.1 U5.79 | length 1055.5
  Top Layer w10: U5.79 6676.35,6856.65 v2(6676,6857) 6679,6860 6687,6860 6727,6900 R70.1
  Bottom Layer w10: v2(6676,6857) 6654,6835 6592,6835 6570,6857 6570,7277 6633,7340 6800,7340 R79.1
MCUTXD1: R74.1 R88.1 U5.85 | length 979.2
  Top Layer w10: v2(6540,6880) 6556.47,6880 6558.24,6878.24 ; U5.85 6558.24,6878.24 ; R74.1 6580,6900 6558.24,6878.24
  Bottom Layer w10: v2(6540,6880) 6540,7280 6620,7360 R88.1
NetBT1_1: BT1.1 R17.2 | length 241.3
  Top Layer w20: R17.2 7490,7070 7490,7164 7526,7200 BT1.1
NetC3_1: C3.1 R1.2 R3.1 U1.5 | length 170
  Top Layer w30: R3.1 C3.1
NetC10_2: C10.2 U2.4 | length 102.7
  Top Layer w20: U2.4 5370,5917 5420,5867 C10.2
NetC15_2: C15.2 U3.4
NetC20_2: C20.2 U5.94 Y1.1 | length 440.2
  Top Layer w10: C20.2 6292,7147 Y1.1 6360,7000 6381.07,6978.93 U5.94
NetC21_2: C21.2 U5.93 Y1.2 | length 440.9
  Top Layer w10: U5.93 6400.76,6980.76 6420,7000 Y1.2 6492,7153 C21.2
NetC26_1: C26.1 U5.65 Y2.1 | length 306.5
  Top Layer w10: U5.65 6854.85,6540.15 6879,6516 6971,6516 C26.1
NetC27_1: C27.1 U5.66 Y2.4 | length 210.2
  Top Layer w10: U5.66 6891.6,6559.84 Y2.4 6911.43,6551.43 6955,6595 C27.1
NetC30_1: C30.1 C31.1 D2.2 R28.2 RE1.1 | length 503.9
  Top Layer w30: C31.1 5805,6005 5861,5949 6120,5949 ; RE1.1 6120,5949 ; D2.2@6175,5994 6165,5994 6120,5949
NetC32_1: C32.1 C37.2 R34.1 U8.1 | length 317
  Top Layer w20: C37.2 6450,5821 6669,5821 6700,5790 U8.1
NetC32_2: C32.2 R34.2 R37.1 U8.2 | length 280.4
  Top Layer w20: R34.2 6555,5740 U8.2 ; R37.1 6645,5740
NetC33_1: C33.1 C36.2 R35.1 U7.1 | length 254.1
  Top Layer w20: R35.1 6718,6077 6740,6055 U7.1
NetC33_2: C33.2 R35.2 R38.1 U7.2 | length 333.3
  Top Layer w20: R38.1 6450,6021 6619,6021 C33.2@6628,6012 ; C33.2 6668,6012 6710,5970 U7.2
NetC34_1: C34.1 R36.1 R44.1 R47.2 U7.7 | length 370.4
  Top Layer w20: U7.7 7011,5970 7036,5995 R44.1 R47.2
NetC34_2: C34.2 R36.2 R40.1 U7.6 | length 489.4
  Top Layer w20: R40.1 6920,6081 6860,6021 6860,5940 6880,5920 7026,5920 7041,5935 R36.2
NetC35_1: C35.1 D3.3 R37.2 | length 159.9
  Top Layer w20: C35.1 R37.2 6580,5641.49 D3.3
NetC36_1: C36.1 R40.2 | length 75
  Top Layer w20: C36.1 R40.2
NetC37_1: C37.1 R38.2 | length 90
  Top Layer w20: C37.1 R38.2
NetC42_2: C42.2 C43.1 R45.2 R48.1 U8.5 | length 368.3
  Top Layer w20: U8.5 7000,5640 7020,5620 C43.1 ; R48.1 R45.2 C42.2
NetC44_2: C44.2 R41.2 R42.2 R43.2 U8.6 U8.7 | length 973.4
  Top Layer w20: R42.2 6705,5830 7040,5830 R43.2 ; R41.2 C44.2 ; R41.2@6851,5560 6851,5830 ; 6851,5690 U8.6 U8.7
NetC46_1: C46.1 R51.1 R52.2 | length 261.5
  Top Layer w10: R52.2 6032,6558 6032,6445 C46.1
  Top Layer w20: R51.1 R52.2
NetC47_1: C47.1 R53.1 R54.2 | length 160.4
  Top Layer w20: C47.1 5925,6438 R53.1 R54.2
NetC54_1: C54.1 U12.4 | length 126
  Top Layer w10: U12.4 6809.23,7394.3 C54.1
NetC54_2: C54.2 U12.2 | length 139.9
  Top Layer w10: U12.2 6860.41,7380.41 6876,7396 6890,7396 6920,7426 C54.2
NetC55_2: C55.2 U12.7 | length 167.5
  Top Layer w10: C55.2 6682,7398 6720,7398 6732.46,7385.54 U12.7
NetC56_1: C56.1 U12.6 | length 124.8
  Top Layer w10: C56.1 6715,7432 6758.05,7388.95 U12.6
NetC56_2: C56.2 U12.5 | length 108.5
  Top Layer w10: C56.2 6783.64,7436.43 U12.5
NetC57_2: C57.2 U12.3 | length 224.2
  Top Layer w10: U12.3 6834.82,7278.18 6893,7220 C57.2
NetC58_2: C58.2 D5.1 R89.1 U14.2 | length 255
  Bottom Layer w20: U14.2 C58.2 R89.1 ; R89.1@7155,7360 D5.1
NetD1_1: D1.1 R20.1 | length 92.1
  Top Layer w20: R20.1 6985,6335 D1.1
NetD1_2: D1.2 Q5.3 | length 114.7
  Top Layer w20: D1.2 7259.01,6335 Q5.3
NetD2_1: D2.1 RE1.8 TR1.3 | length 359.2
  Top Layer w20: TR1.3 6091.01,6032 6242,6032 6320,5954 RE1.8
NetD5_2: D5.2 R79.2 R83.1 R88.2 R89.2 U13.4 | length 719.2
  Bottom Layer w10: R79.2 7005,7200 7146,7200 7211,7265 U13.4
  Bottom Layer w20: R79.2 R88.2 ; R89.2 R83.1 ; U13.4 7237,7265 7237,7422 D5.2
NetL1_1: L1.1 U1.3 | length 200.7
  Top Layer w60: L1.1 5400,7220 5400,7189
NetQ1_1: Q1.1 R8.2 R10.1 | length 178.1
  Top Layer w20: R10.1 5446.02,5620.02 Q1.1
NetQ2_1: Q2.1 R9.2 R11.1 | length 167.1
  Top Layer w20: Q2.1 5510.99,6800 R11.1
NetQ3_1: Q3.1 R12.2 R14.1 | length 165.1
  Top Layer w20: Q3.1 5507.02,5690 R12.2
NetQ3_3: Q3.3 R10.2 | length 210.7
  Top Layer w10: Q3.3 5235,5693.98 5235,5583 5262.98,5555.02 R10.2
NetQ4_1: Q4.1 R13.2 R15.1 | length 165.1
  Top Layer w20: Q4.1 5839,6800.02 R13.2
NetQ4_3: Q4.3 R11.2 | length 98.3
  Top Layer w20: R11.2 5569,6870 Q4.3
NetQ5_1: Q5.1 R22.1 | length 82.1
  Top Layer w10: R22.1 7301,6486 Q5.1
NetQ6_1: Q6.1 R67.2 | length 130.1
  Bottom Layer w20: R67.2 5440,6383 Q6.1
NetQ6_2: Q6.2 R69.1 U11.3 | length 175.4
  Bottom Layer w20: Q6.2 5579,6400 R69.1@5580,6401 ; U11.3@5580,6293 R69.1
NetQ6_3: Q6.3 R64.2 U11.1 | length 212.5
  Bottom Layer w20: Q6.3 5500,6297.99 R64.2 5510,6193 U11.1
NetR6_2: R6.2 R7.1 U4.1 | length 175.6
  Top Layer w20: U4.1 R7.1 ; R6.2 R7.1@5695,6655
NetR21_2: R21.2 U5.54 | length 944.7
  Top Layer w10: v2(6740,6289) 6740,6300 6763.61,6323.61 U5.54 ; v2(7400,6040) 7400,6020 R21.2
  Bottom Layer w10: v2(6740,6289) 6740,6200 6810,6130 7310,6130 v2(7400,6040)
NetR30_2: R30.2 R33.2 TR1.1 | length 256.6
  Top Layer w20: R33.2 5910,6110 6110,6110 R30.2
NetR41_1: R41.1 U8.3 | length 204.9
  Top Layer w20: U8.3 6790,5690 6810,5670 6810,5619 6770,5579 R41.1
NetR42_1: R42.1 U7.3 | length 229
  Top Layer w20: R42.1 6560,5930 6590,5960 6660,5960 6700,5920 U7.3
NetR43_1: R43.1 U7.5 | length 198.9
  Top Layer w20: U7.5 7005,5870 7026,5891 7093,5891 7120,5864 R43.1
NetR46_1: R46.1 R50.2 U9.4 | length 167.1
  Top Layer w20: U9.4 7325,5565 R46.1
NetR47_1: R47.1 U9.3 | length 95.4
  Top Layer w20: R47.1 7325,5885 U9.3
NetR55_1: R55.1 R56.2 U10.1 | length 413.5
  Top Layer w10: R56.2 5435,6455 5509,6381 5509,6377 U10.1@5520,6366 ; R55.1 5505,6250 5550,6250 5585,6285 5585,6339 5558,6366 U10.1@5517,6366
NetR57_1: R57.1 R60.1 U10.7 | length 295.5
  Top Layer w10: R57.1 5575,6438 5672.59,6340.41 5769.41,6340.41 5789,6360 R60.1
NetR58_1: R58.1 R59.1 U10.2 | length 212.3
  Top Layer w10: R58.1 5365,6440 5425,6380 5453,6380 5492.59,6340.41 U10.2
NetR59_2: R59.2 R61.1 U10.3 | length 187.6
  Top Layer w10: R61.1 5400.18,6314.82 U10.3
NetR60_2: R60.2 R62.1 U10.6 | length 184
  Top Layer w10: U10.6 5767.18,6314.82 5787,6295 R60.2
  Top Layer w20: R62.1 R60.2
NetR70_2: R70.2 U12.13 | length 120.1
  Top Layer w10: U12.13 6706.87,7003.13 R70.2
NetR72_2: R72.2 U12.15 | length 245.3
  Top Layer w10: U12.15 6758.05,7015.95 6829,6945 6862,6945 6895,6912 R72.2
NetR74_2: R74.2 U12.12 | length 113.1
  Top Layer w10: R74.2 6681.28,6986.28 U12.12
NetR77_2: R77.2 U12.10 | length 90.6
  Top Layer w10: R77.2 6643.76,7345 U12.10
NetR78_1: R78.1 R84.1 R86.2 U13.7 | length 942.6
  Bottom Layer w10: R84.1 7070,6835 7070,6943 7087,6960 R78.1
  Bottom Layer w20: R78.1 7145,7005 7190,7050 7490,7050 7560,7120 R86.2 7553,7165 U13.7
NetR80_1: R80.1 R86.1 R87.1 U13.6 | length 1054.4
  Top Layer w10: v2(7309,6631) 7315,6637 7315,7005 v2(7310,7010)
  Bottom Layer w10: v2(7309,6631) 7320,6642 R87.1
  Bottom Layer w20: R80.1 7320,7000 7340,7020 7520,7020 7610,7110 7610,7193 7580,7223 R86.1 7552,7215 U13.6
NetR81_2: R81.2 R82.1 R85.2 U13.1 | length 452
  Bottom Layer w20: R81.2 R85.2 ; 6945,7115 U13.1 ; R82.1 7020,7115
NetU13_2: U13.2 U13.3 U14.4 | length 159.1
  Bottom Layer w20: U14.4 7140,7165 U13.2 U13.3
P1.0: U5.91
P1.1: R22.2 U5.90 | length 1105.7
  Top Layer w10: v2(6440,6865) 6459.81,6845.19 U5.90 ; v2(6920,6800) 6960,6760 7013,6760 7090,6683 7090,6610 7115,6585 7208,6585 7231,6562 R22.2
  Bottom Layer w10: v2(6440,6865) 6510,6795 6915,6795 v2(6920,6800)
P1.2: K2.1 R26.2 U5.89 | length 887.4
  Top Layer w10: U5.89 v2(6479.5,6865.5) ; v2(6960,6800) R26.2 7136.48,6663.52 K2.1
  Bottom Layer w10: v2(6479.5,6865.5) 6529.99,6815 6795,6815 6820,6840 6920,6840 v2(6960,6800)
P1.3: K1.1 R25.2 U5.88 | length 837.3
  Top Layer w10: U5.88 6499.18,6740.82 v2(6500,6740) ; v2(7080,6760) 7080,6790 R25.2 7102,6800 7110,6800 7161,6851 K1.1
  Bottom Layer w10: v2(6500,6740) 6535,6775 7065,6775 v2(7080,6760)
P1.4: U5.87
P2.0: U5.83
P2.1: U5.82
P2.2: U5.81
P2.3: U5.80
P2.7: JP2.17 U5.76 | length 1027.1
  Top Layer w10: U5.76 6878.04,6801.96 6940,6740 6990,6740 v2(7045,6685)
  Bottom Layer w10: v2(7045,6685) 7045,6602 7092,6555 7378.08,6555 7450,6626.92 7450,6683 7463.92,6696.92 JP2.17
P3.0: JP2.18 U5.75 | length 1010.6
  Top Layer w10: U5.75 6910,6737 6927,6720 6975,6720 v2(6985,6710)
  Bottom Layer w10: v2(6985,6710) 7020,6675 7020,6593 7078,6535 7388,6535 7470,6617 7470,6640 7487,6657 7558.82,6657 JP2.18
P3.1: JP2.15 U5.74 | length 881.3
  Top Layer w10: U5.74 6902.69,6717.31 6926,6694 v2(6946,6694)
  Bottom Layer w10: v2(6946,6694) 7000,6640 7000,6580 7065,6515 7399,6515 7502.18,6618.18 JP2.15
P3.2: JP2.16 U5.73 | length 950.9
  Top Layer w10: U5.73 6882.37,6697.63 v2(6890,6690)
  Bottom Layer w10: v2(6890,6690) 6980,6600 6980,6570 7055,6495 7410,6495 7493,6578 7558.56,6578 JP2.16
P3.3: JP2.13 U5.72 | length 837.4
  Top Layer w10: U5.72 6854.06,6677.94 v2(6868,6664)
  Bottom Layer w10: v2(6868,6664) 6960,6572 6960,6560 7045,6475 7422,6475 7486.44,6539.44 JP2.13
P3.4: JP2.14 U5.71 | length 917.5
  Top Layer w10: U5.71 6832.74,6658.26 v2(6860,6631)
  Bottom Layer w10: v2(6860,6631) 7036,6455 7431,6455 7475,6499 7558.3,6499 JP2.14
P3.6: JP2.11 U5.69 | length 1039.6
  Top Layer w10: v2(6690,6605) 6703.89,6618.89 U5.69
  Bottom Layer w10: v2(6690,6605) 6705,6620 6833,6620 7018,6435 7455,6435 7480.7,6460.7 JP2.11
P3.7: JP2.12 U5.68 | length 1054.3
  Top Layer w10: v2(6720,6585) 6734.2,6599.2 U5.68
  Bottom Layer w10: v2(6720,6585) 6835,6585 7005,6415 7462,6415 7469,6422 7560.04,6422 JP2.12
P4.1: JP2.5 U5.53 | length 752.5
  Top Layer w10: U5.53 6870.07,6303.93 v2(6880,6294)
  Bottom Layer w10: v2(6880,6294) 7386,6294 7455.52,6224.48 JP2.5
P4.2: JP2.6 U5.52 | length 855.8
  Top Layer w10: U5.52 6835.76,6284.24 v2(6860,6260)
  Bottom Layer w10: v2(6860,6260) 7380,6260 7455,6185 7559.26,6185 JP2.6
P4.3: JP2.3 U5.51 | length 763
  Top Layer w10: v2(6820,6240) U5.51@6820,6264
  Bottom Layer w10: v2(6820,6240) 6828,6232 7368,6232 7454.26,6145.74 JP2.3
P4.7: U5.47
P5.0: U5.55
P5.1: JP2.8 U5.56 | length 1015.5
  Top Layer w10: v2(6720,6320) 6762.98,6362.98 U5.56
  Bottom Layer w10: v2(6720,6320) 7400,6320 7455,6265 7560.52,6265 JP2.8
P5.2: JP2.7 U5.57 | length 913.3
  Top Layer w10: v2(6720,6360) 6742.67,6382.67 U5.57
  Bottom Layer w10: v2(6720,6360) 6740,6340 7413,6340 7449.78,6303.22 JP2.7
P5.3: JP2.10 U5.58 | length 999
  Top Layer w10: v2(6720,6400) 6722.35,6402.35 U5.58
  Bottom Layer w10: v2(6720,6400) 6760,6360 7440,6360 7456,6344 7560.78,6344 JP2.10
P5.4: JP2.9 U5.59 | length 911.8
  Top Layer w10: v2(6720,6440) 6737.96,6422.04 U5.59
  Bottom Layer w10: v2(6720,6440) 6778.04,6381.96 JP2.9
P5.5: U5.60
P5.6: U5.61
P5.7: U5.62
P7.0: U5.46
P7.1: U5.45
P7.2: U5.44
P7.3: U5.43
P7.4: U5.42
P7.5: U5.41
P7.6: U5.40
P7.7: U5.39
P8.0: U5.38
P8.1: U5.37
P8.2: U5.36
P8.3: U5.35
P8.4: U5.34
P8.5: U5.33
P8.6: U5.32
P8.7: U5.31
P9.0: U5.30
P9.1: U5.29
P9.2: U5.28
P9.6: U5.24
P9.7: U5.23
P10.3: R27.1 U5.19 | length 141.4
  Top Layer w10: v2(6108.33,6382.67) U5.19
  Bottom Layer w10: R27.1 6085.33,6382.67 v2(6108.33,6382.67)
PCRX/B-: JP2.22 R73.2 R78.2 | length 514.9
  Bottom Layer w10: R78.2 R73.2 7270,6815 7559.34,6815 JP2.22
PCTX/A+: JP2.21 R71.2 R80.2 | length 228.5
  Bottom Layer w10: R80.2 R71.2 7405.6,6854.4 JP2.21
PULSE: R27.2 R66.2 U11.5 | length 362.7
  Bottom Layer w20: U11.5 5830,6243 5800,6273 5800,6320 5830,6350 5891,6350 5925,6384 R66.2 R27.2
PULSE2: JP3.15 JP3.16 R68.1 | length 202.5
  Bottom Layer w20: JP3.16 5273.82,6381.82 R68.1
PWR_CN: R2.1 U1.1 U5.11 | length 1226.4
  Top Layer w10: U1.1 v2(5461,7094) 5495,7060 5495,6993 5528,6960 R2.1 ; v2@6130,6540 v2(6130.15,6540.15) U5.11
  Bottom Layer w10: v2(5461,7094) 5670,6885 5828,6885 6105,6608 6105,6565.3 v2(6130.15,6540.15)
RAIN1: JP3.19 JP3.20 R65.2 | length 202.6
  Bottom Layer w20: JP3.20 5273.66,6224.34 R65.2
RAIN2/PULSE1: JP3.17 JP3.18 R67.1 | length 193.9
  Bottom Layer w10: R67.1@5294.92,6303.08 R67.1
  Bottom Layer w20: JP3.18 5101.34,6303 R67.1
RED: JP3.23 JP3.24 RE1.6 | length 1580
  Bottom Layer w20: JP3.24 5193.14,6066.86 5240,6020 5240,5880 5580,5540 6172.6,5540 RE1.6
RED_R: C35.2 RE1.5 | length 148.8
  Top Layer w20: RE1.5 6356.79,5600.79 C35.2
RED_T: RE1.7 U6.6 U6.7 | length 468
  Top Layer w20: U6.6 U6.7 6030,5750 6060,5780 6060,5820 6080,5840 6254.02,5840 RE1.7
RES_SENSOR+: JP3.11 R51.2 | length 701
  Top Layer w10: v2(5800,6560) 5830,6560 R51.2
  Bottom Layer w10: JP3.11 5779.3,6539.3 v2(5800,6560)
RES_SENSOR-: JP3.12 R53.2 | length 789.5
  Top Layer w10: v2(5800,6520) 5845,6520 R53.2
  Bottom Layer w10: JP3.12 5140.56,6500 5220,6500 5240,6520 v2(5800,6520)
RESET: C22.2 JP1.11 R16.1 S1.2 U5.100 | length 973.1
  Top Layer w10: C22.2 5947.02,6801.96 U5.100 ; JP1.11 6007,7360.7 6007,7061 6080,6988 6080,6939 6100,6919 6100,6801.96
RS232RX0: R73.1 U12.16 | length 472.8
  Top Layer w10: U12.16 6783.64,7016.36 6835,6965 6935,6965 6980,6920 v2(7100,6920)
  Bottom Layer w10: v2(7100,6920) R73.1
RS232RX1: R76.1 U12.9 | length 1357.2
  Top Layer w10: U12.9 6681.28,7263.72 6705,7240 6811,7240 7081,6970 7237,6970 7275,6932 7275,6815 7250,6790 7250,6743 7280,6713 7280,6640 7250,6610 7130,6610 v2(7120,6620)
  Bottom Layer w10: v2(7120,6620) 7145,6645 R76.1
RS232TX0: R71.1 U12.17 | length 620.3
  Top Layer w10: U12.17 6809.23,7019.77 6844,6985 6948,6985 6983,6950 7213,6950 v2(7246,6917)
  Bottom Layer w15: v2(7246,6917) 7288,6875 R71.1
RS232TX1: R75.1 U12.8 | length 1019.3
  Top Layer w10: U12.8 6706.87,7273.13 6720,7260 6820,7260 7090,6990 7257,6990 7295,6952 7295,6775 v2(7280,6760)
  Bottom Layer w10: v2(7280,6760) R75.1
SENSORRX/B-: JP2.20 R76.2 R84.2 | length 639
  Bottom Layer w10: R84.2 7210,6630 7235,6605 7340,6605 7360,6625 7412,6625 7430,6643 7430,6710 7455,6735 7558.08,6735 JP2.20
SENSORTX/A+: JP2.19 R75.2 R87.2 | length 226.5
  Bottom Layer w10: R87.2 R75.2 7400.66,6775.66 JP2.19
TCK: JP1.7 U5.99 | length 771
  Top Layer w10: JP1.7 6165,7361.22 6165,7265 6125,7225 6125,6880 6145,6860 6273,6860 6282.65,6850.35 U5.99
TDI: JP1.3 U5.97 | length 844
  Top Layer w10: U5.97 6322.02,6867.98 6290,6900 6180,6900 6165,6915 6165,7185 6245,7265 6305,7265 6322,7282 6322,7360.74 JP1.3
TDO: JP1.1 U5.96 | length 886.9
  Top Layer w10: U5.96 6341.7,6878.3 6300,6920 6200,6920 6185,6935 6185,7174 6256,7245 6358,7245 6401,7288 6401,7361 JP1.1
TMS: JP1.5 U5.98 | length 790.5
  Top Layer w10: JP1.5 6243,7360.48 6243,7296 6145,7198 6145,6895 6160,6880 6280,6880 6302.33,6857.67 U5.98
TRAN_PWR_CN: JP2.4 U5.50 | length 927.2
  Top Layer w10: U5.50 6788.6,6199.6 v2(6800,6211)
  Bottom Layer w10: v2(6800,6211) 7349,6211 7453,6107 7560,6107 JP2.4
VBAT: C1.1 C2.2 JP3.1 JP3.3 Q1.2 Q2.2 R8.1 R9.1 U1.4 | length 2797.2
  Top Layer w40: v1(5040,5900) 5040,6980 5061,7001 5180,7001 ; 5180,6900 5326,6900 5356,6870 R9.1 ; R8.1 5375.01,5540 v1(5490,5540)
  Top Layer w60: C2.2@5130,7073 5180,7073 ; JP3.3 C1.1 ; C1.1@5180,7169 U1.4
  Bottom Layer w40: v1(5040,5960) v1(5040,5900) 5400,5540 v1(5490,5540)
  other v1: 5410,5540
VCOLL: C28.1 C29.2 Q1.3 R28.1 R64.1 R65.1 U6.1 U6.8 | length 1400.8
  Top Layer w30: Q1.3 5665,5721.01 C29.2 U6.8 R28.1
  Bottom Layer w20: R64.1 R65.1 5360,5880 v1(5590,5650)
VCORE: C16.1 C17.2 Q2.3 U4.3 U4.4 | length 507.1
  Top Layer w20: U4.4 U4.3
  Top Layer w40: C16.1@5271,6730 U4.4 ; Q2.3 5271,6729 C16.1
VOL_CUR+: JP3.13 R58.2 | length 123.5
  Top Layer w10: JP3.13 5274.44,6460.56 R58.2
VOL_CUR-: JP3.14 R61.2 | length 238.5
  Top Layer w10: JP3.14 5141.82,6420 5230,6420 R61.2 R61.2@5294,6355
VREF: C18.1 C19.2 JP3.5 R6.1 U4.5 U5.9 | length 1846.5
  Top Layer w10: U5.9 6280.48,6579.52 6320,6540 v2(6320,6460)
  Top Layer w20: JP3.5 5230,6725.52 5230,6536 5256,6510 5476,6510 C18.1
  Top Layer w40: U4.5@5521,6645 5521,6577 5529.63,6568.37 R6.1
  Bottom Layer w20: v2(5585,6573) 5747,6573 5774,6600 6020,6600 6160,6460 v2(6320,6460) C19.2@6320,6510
VW_DRIVE: U5.70 U6.2 | length 1457
  Top Layer w10: v2(6140,6140) 6638.57,6638.57 U5.70
  Top Layer w20: U6.2 v2(5850,5750)
  Bottom Layer w20: v2(5850,5750) 5850,5850 v2(6140,6140)
VW_EN: R31.1 U5.27 U6.3 | length 934.3
  Top Layer w10: U6.3 5813,5700 v2(5835,5678) R31.1 ; v2(6260,6080) 6282.65,6102.65 U5.27
  Bottom Layer w10: v2(5835,5678) 5885,5728 5885,5765 6200,6080 v2(6260,6080)
VW_RA: R44.2 U5.77 | length 1444.1
  Top Layer w10: v2(6680,6666) 6715.72,6701.72 U5.77 ; R44.2 7303,5995 v2(7329,5969)
  Bottom Layer w10: v2(6680,6666) 6660,6646 6660,6175 6730,6105 7128,6105 7264,5969 v2(7329,5969)
VW_RD: R21.1 R49.2 U5.86 U9.1 | length 1794.7
  Top Layer w10: U5.86 6538.55,6741.45 6614,6666 v2(6640,6666)
  Top Layer w20: R21.1 7400,5915 U9.1 7463,5825 7478,5840 R49.2
  Bottom Layer w10: v2(6640,6666) 6640,6160 6715,6085 7115,6085 7320,5880 v2(7400,5880)
VW_TRCN: R30.1 U5.26 | length 143.6
  Top Layer w10: R30.1 6262.96,6137.96 U5.26
WHITE: JP3.7 JP3.8 R23.2 | length 802.8
  Top Layer w10: v2(5785,6710) R23.2
  Bottom Layer w10: JP3.8 JP3.7 5256.78,6620 5695,6620 v2(5785,6710)
pads on no net: JP1.4 JP1.6 JP1.8 JP1.10 JP1.12 JP1.13 JP1.14 U5.16 U5.17 U5.20 U5.21 U5.22 U12.11 U14.1

## Polygon pours and split planes (outlines as drawn)
DGND on Top Layer "Top Layer" (solid, remove dead copper, pour order 2): 5000,5500 7700,5500 7700,7500 5000,7500 5000,5500
DGND on Bottom Layer "Top Layer" (solid, remove dead copper, pour order 4): 5000,5500 7700,5500 7700,7500 5000,7500 5000,5500

## Keep-outs
Keep-Out Layer:
  lines w10: 5000,5500 5000,7500 7700,7500 7700,5500 5000,5500

## Other copper
Top Layer:
  rectangle net +3.3VCORE: 5825,7000 5943,7059
  rectangle net NetC15_2: 5640,7005 5735,7045
  rectangle net CORE_PWR_CN: 5640,7080 5734,7120
  rectangle net NetC3_1: 5275,7025 5325,7100
  rectangle net +3.3VCOLL: 5440,6061 5561,6139
  rectangle net +3.3VCOLL: 5381,5989 5480,6080

## Silkscreen, mask and mechanical layers (free items; w line width, h text height)
Top Overlay:
  circle w200: c7305,7160 r95
  rectangle: 7442,6571 7453,6585
  rectangle: 7432,6559 7451,6577
  rectangle: 7421,6552 7446,6566
  rectangle: 7467,6597 7486,6614
  rectangle: 7453,6585 7471,6597
  rectangle: 7462,6589 7483,6602
  rectangle: 7446,6552 7483,6589
  rectangle: 7431,6424 7448,6440
  rectangle: 7420,6436 7444,6448
  rectangle: 7452,6403 7466,6414
  rectangle: 7470,6384 7485,6399
  rectangle: 7462,6393 7485,6416
  rectangle: 7442,6412 7484,6448
  rectangle: 7396,6458 7414,6471
  rectangle: 7388,6466 7412,6481
  rectangle: 7364,6489 7382,6510
  rectangle: 7397,6529 7417,6542
  rectangle: 7389,6520 7412,6535
  rectangle: 7377,6477 7422,6524
  rectangle: 7408,6445 7490,6555
  lines w10: 7360,6500 7485,6375 7485,6625 7360,6500
Bottom Overlay:
  text "PN:RD15002SCT-CORE 20160225" at 5965,6655 h30
  text "VN:RD15002SCT-CORE V1.0.0" at 5965,6600 h30
Mechanical 1:
  lines w10: 5000,5500 5000,7500 7700,7500 7700,5500 5000,5500

## Text inside footprints (layer, text, board x,y; h text height)
BT1: Top Overlay "+" at 7600,7305 h60 r180; Top Overlay "-" at 7600,7080 h60 r180
JP2: Bottom Overlay "1" at 7480.63,5948.89 h60 r270
JP3: Bottom Overlay "1" at 5219.37,7051.11 h60 r90
RE1: Top Overlay "1" at 6170,5905 h30 r270; Top Overlay "8" at 6270,5890 h30 r90